# Altium PCB OSVentilatorV1.PcbDoc
Units mm, origin at the board's own origin, x right, y up, seen from the top; angles counter-clockwise.
Board outline 114.3 x 38.1 mm, 4 copper layers (Top Layer, Signal Layer 1, Signal Layer 2, Bottom Layer), stack 1.587 mm thick; 89 components, 68 nets, 351 pads, 167 vias.
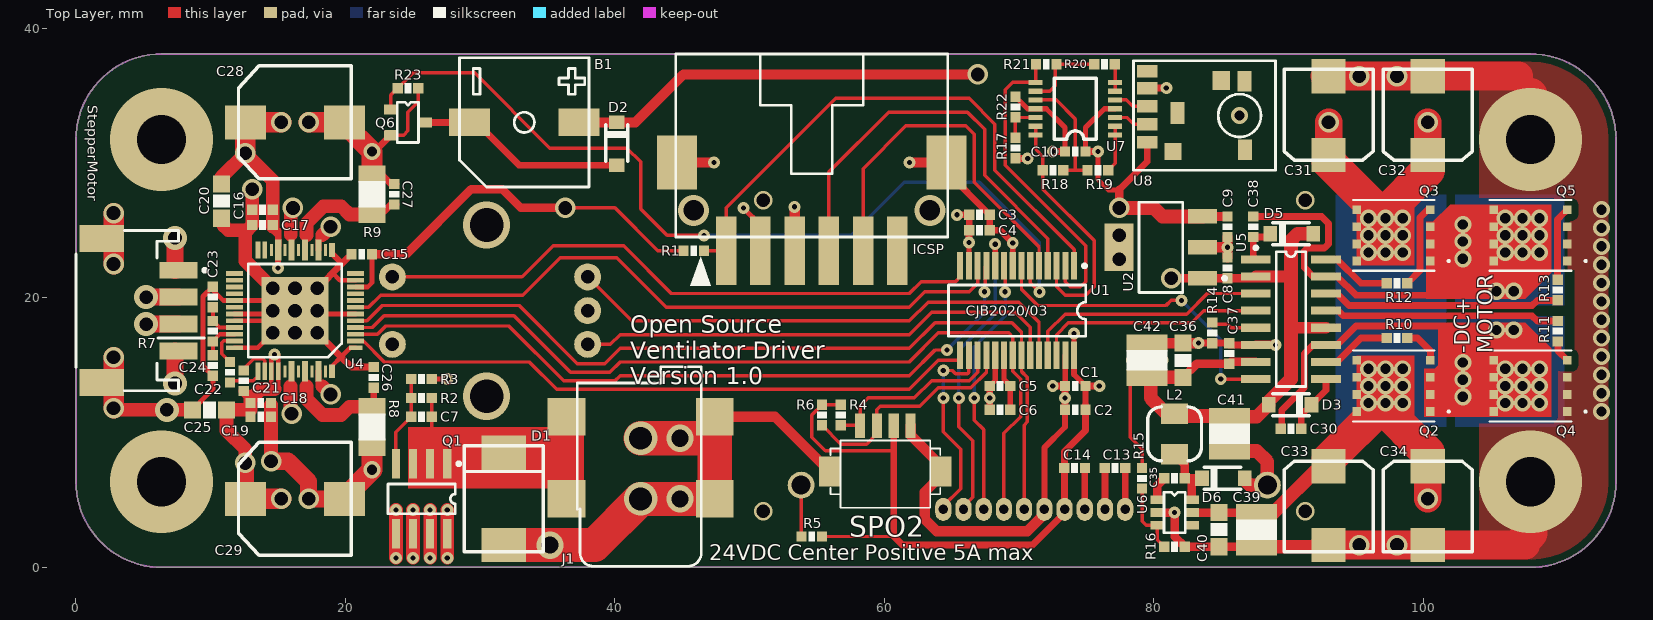
[diagram p0: Top Layer view]
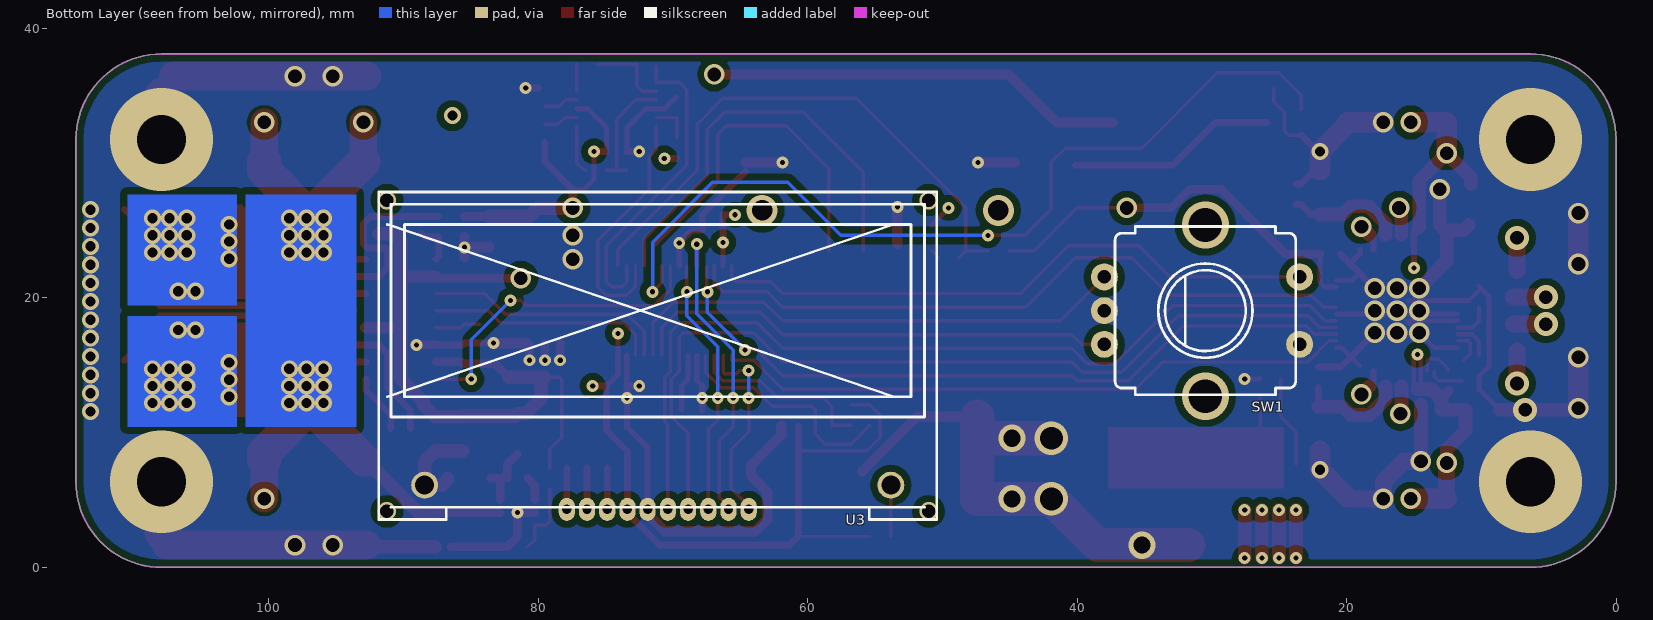
[diagram p1: Bottom Layer view, seen from below]
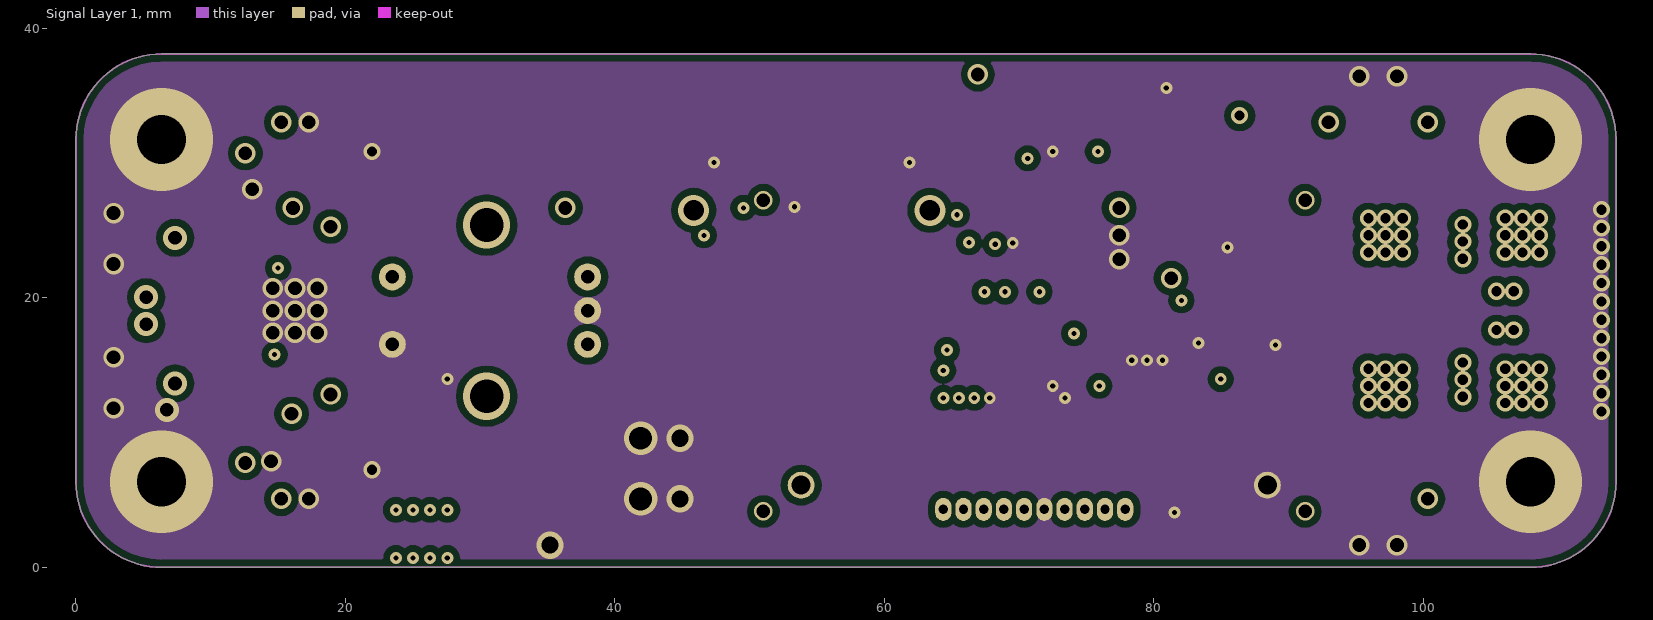
[diagram p2: Signal Layer 1]
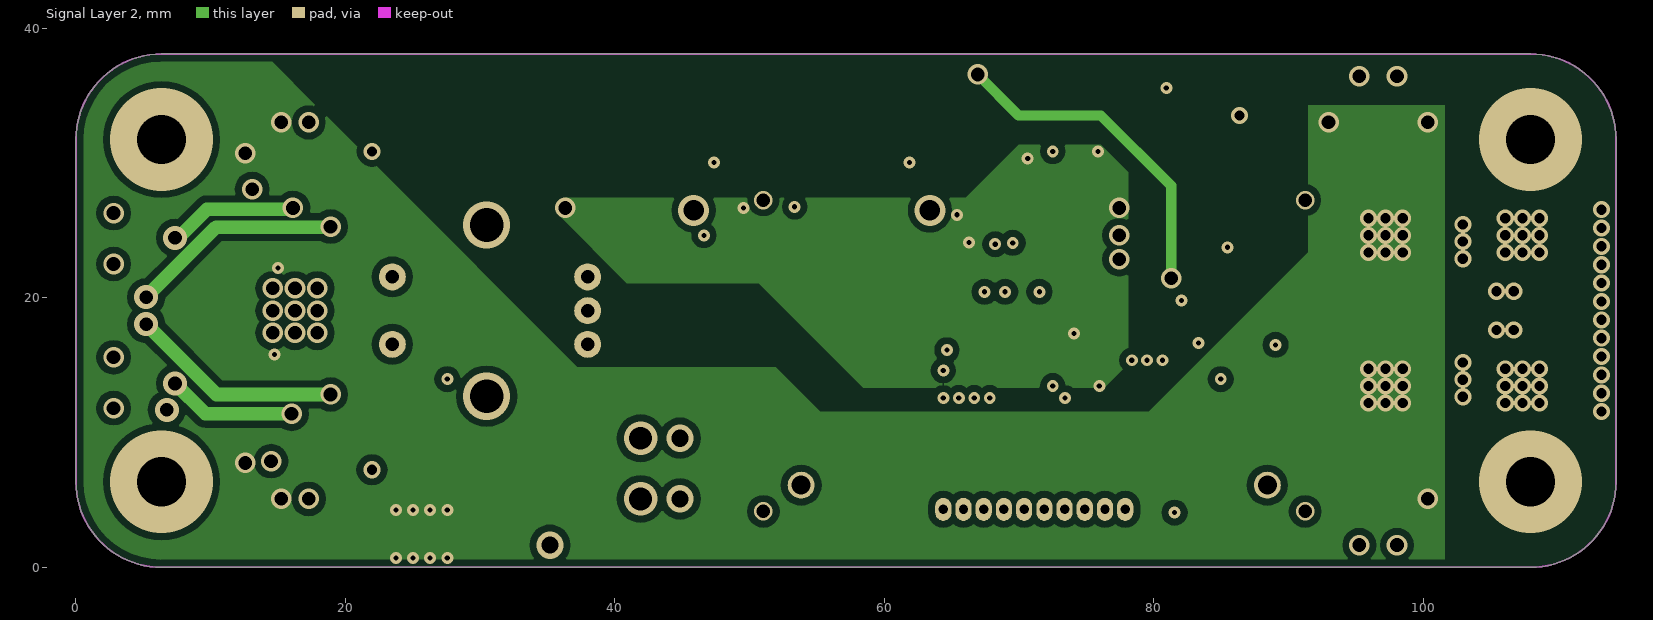
[diagram p3: Signal Layer 2]
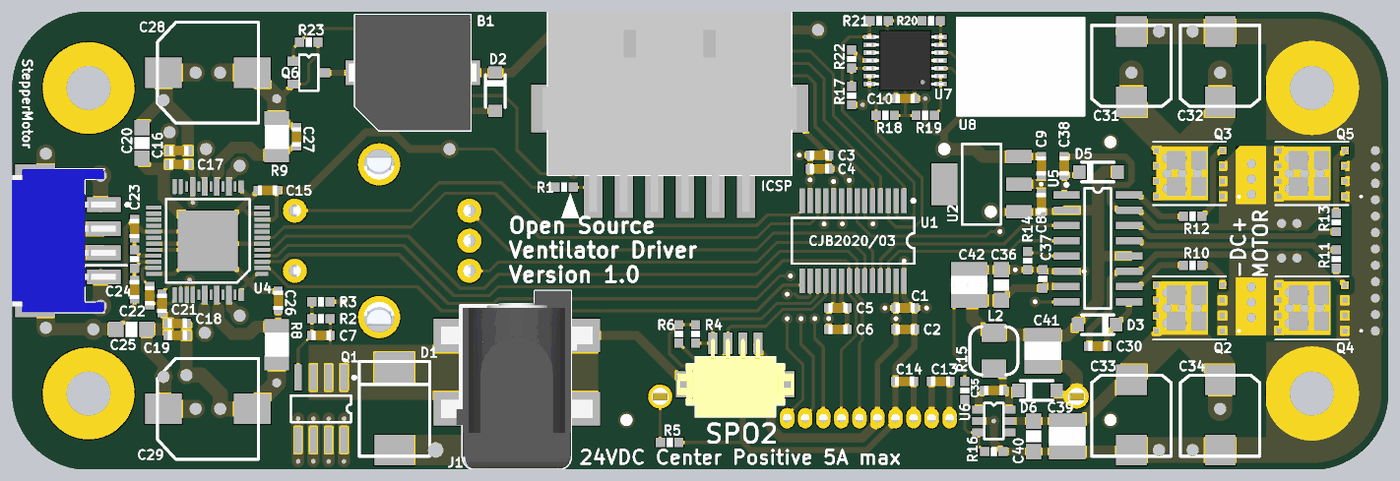
[diagram p4: 3D render of the assembled board from above, using the file's embedded part models]

## Layer stack, top to bottom
Top Solder: solder mask 0.0102, Solder Resist, Dk 3.5
Top Layer: signal copper 0.0356
Dielectric 1: core 0.254, FR-4, Dk 4.2
Signal Layer 1: signal copper 0.036
Dielectric 3: prepreg 0.9364, Dk 4.2
Signal Layer 2: signal copper 0.036
Dielectric 2: core 0.254, Dk 4.2
Bottom Layer: signal copper 0.0356
Bottom Solder: solder mask 0.0102, Solder Resist, Dk 3.5

## Board outline
6.35,0 cw(c6.35,6.35) 0,6.35 0,31.75 cw(c6.35,31.75) 6.35,38.1 107.95,38.1 cw(c107.95,31.75) 114.3,31.75 114.3,6.35 cw(c107.95,6.35) 107.95,0

## Design rules (kind name [scope] priority, off if disabled: settings)
Clearance Clearance_1 [InPoly] p1: gap=0.508 ignorepadtopadclearanceinfootprint=FALSE
Clearance [All] p2: gap=0.152 ignorepadtopadclearanceinfootprint=FALSE
ComponentClearance [All] p1 off: gap=0.254 collisioncheckmode=3 verticalgap=0.254 showdistances=FALSE
Height [All] p1 off: minheight=0 maxheight=25.4 prefheight=12.7
PolygonConnect [All] p1: connectstyle=Direct reliefconductorwidth=0.254 reliefentries=4 polygonreliefangle="90 Angle" airgapwidth=0.254
RoutingVias [All] p1: holewidth=0.381 width=0.889 viastyle="Through Hole" minholewidth=0.381 minwidth=0.889 maxholewidth=25.4 maxwidth=25.4
SolderMaskExpansion [All] p1: expansion=0.102 istentingtop=FALSE
Width [All] p1: maxlimit=25.4 minlimit=0.254 preferedwidth=0.254
28 further rules are at their usual default settings.

## Components (designator, comment, footprint, x,y, rotation, side; value= is the part's Value field where it differs from the comment)
B1 "668-1536-1-ND" "Buzzer 9.6mm Square" 33.274,33.02 r270 top
C1 "CAP_0805" "0603 Cap" 74.168,13.462 r180 top value=0.1uF
C2 "CAP_0805" "0603 Cap" 74.168,11.684 r180 top value=10nF
C3 "CAP_0805" "0603 Cap" 67.056,26.162 r0 top value=0.1uF
C4 "CAP_0805" "0603 Cap" 67.056,25.019 r0 top value=10nF
C5 "CAP_0805" "0603 Cap" 68.58,13.462 r180 top value=10uF
C6 "CAP_0805" 0603 68.58,11.684 r180 top value=1uF
C7 "CAP_0805" "0603 Cap" 25.654,11.176 r180 top value=4.7uF
C8 "CAP_0805" 0603 85.471,22.225 r90 top value=1uF
C9 "CAP_0805" 0603 85.471,25.273 r270 top value=1uF
C10 "CAP_0805" 0603 74.168,30.861 r180 top value=0.1uF
C13 "CAP_0805" "0603 Cap" 77.114,7.366 r180 top value=1uF
C14 "CAP_0805" "0603 Cap" 74.117,7.366 r180 top value=1uF
C15 "CAP_0805" "0603 Cap" 21.209,23.241 r180 top value=0.1uF
C16 "CAP_0805" "0603 Cap" 13.843,26.543 r180 top value=0.1uF
C17 "CAP_0805" "0603 Cap" 13.843,25.4 r180 top value=0.1uF
C18 "CAP_0805" "0603 Cap" 13.716,12.192 r0 top value=0.1uF
C19 "CAP_0805" "0603 Cap" 13.716,11.176 r0 top value=0.1uF
C20 "CAP_0805" "0805 Cap" 10.795,27.178 r270 top value="4.7uF 50v"
C21 "CAP_0805" "0603 Cap" 12.446,13.843 r90 top value=0.1uF
C22 "CAP_0805" "0603 Cap" 11.43,14.478 r270 top value="22nF 50v"
C23 "CAP_0805" "0603 Cap" 10.16,20.066 r90 top value=4.7uF
C24 "CAP_0805" "0603 Cap" 10.16,14.986 r270 top value=470nF
C25 "CAP_0805" "0805 Cap" 9.906,11.684 r180 top value="4.7uF 50v"
C26 "CAP_0805" "0603 Cap" 22.098,14.097 r90 top value=0.1uF
C27 "CAP_0805" "0603 Cap" 23.622,27.686 r90 top value=0.1uF
C28 "Capacitor Electrolytic" "Cap 8.3mm²" 16.256,33.02 r180 top locked value="330uF 25V"
C29 "Capacitor Electrolytic" "Cap 8.3mm²" 16.256,5.08 r180 top locked value="330uF 25V"
C30 "CAP_0805" "0603 Cap" 90.17,10.287 r0 top value="4.7uF 16v"
C31 "Capacitor Electrolytic" "Cap 6.6mm²" 92.964,33.528 r270 top locked value="220uF 35v"
C32 "Capacitor Electrolytic" "Cap 6.6mm²" 100.33,33.528 r270 top locked value="220uF 35v"
C33 "Capacitor Electrolytic" "Cap 6.6mm²" 92.964,4.572 r90 top locked value="220uF 35v"
C34 "Capacitor Electrolytic" "Cap 6.6mm²" 100.33,4.572 r90 top locked value="220uF 35v"
C35 "CAP_0805" "0603 Cap" 81.534,6.604 r0 top value=0.1uF
C36 "CAP_0805" 0805 82.169,15.367 r270 top value="10uF 16v"
C37 "CAP_0805" "0603 Res" 85.598,15.875 r270 top value="0.1uF 50V"
C38 "CAP_0805" "0603 Cap" 87.376,25.273 r270 top value="4.7uF 16v"
C39 "CAP_0805" "1210 Cap" 87.63,2.794 r270 top value="4.7uF 50v"
C40 "CAP_0805" "0805 Cap" 84.836,2.794 r270 top value=0.1uF
C41 "311-2054-1-ND" "1210 Cap" 85.598,9.906 r270 top value=47uF
C42 "311-2054-1-ND" "1210 Cap" 79.502,15.367 r90 top value=47uF
D1 "3.0SMCJ24ADICT-ND" DSO-C2/X3.3 31.75,5.08 r90 top
D2 "DB2W31800LCT-ND" SOD123 40.132,31.496 r0 top
D3 "DB2W31800LCT-ND" SOD123 90.17,12.065 r270 top
D5 "DB2W31800LCT-ND" SOD123 90.17,24.765 r90 top
D6 "DB2W31800LCT-ND" SOD123 85.09,6.604 r90 top
ICSP "TE MTE" "TE MTE 6POS SMT RA" 54.61,38.1 r0 top locked
J1 "2.5mm Power" "Power Jack 2.5x5.5 SMD RA" 41.91,5.08 r0 top locked
L2 "445-6553-1-ND" "Inductor - 4mm²" 81.534,9.906 r90 top value=6.8uH
Q1 "FDS4141" "SOIC 8" 25.654,5.08 r180 top
Q2 "CSD18563Q5A" VSONP-8 97.79,13.462 r180 top
Q3 "CSD18563Q5A" VSONP-8 97.79,24.638 r180 top
Q4 "CSD18563Q5A" VSONP-8 107.95,13.462 r180 top
Q5 "CSD18563Q5A" VSONP-8 107.95,24.638 r180 top
Q6 "MOSFET Nch SO-23-6" sot23-3 24.638,33.02 r270 top
R1 "RES_0805" "0603 Res" 45.847,23.495 r0 top value=10k
R2 "RES_0805" "0603 Res" 25.654,12.573 r180 top value=100k
R3 "RES_0805" "0603 Res" 25.654,13.97 r180 top value=100k
R4 "RES_0805" "0603 Res" 56.769,11.303 r270 top value=10k
R5 "RES_0805" "0603 Res" 54.61,2.286 r0 top value=10
R6 "RES_0805" "0603 Res" 55.372,11.303 r270 top value=10k
R7 "RES_0805" "0603 Res" 10.16,17.526 r270 top value=2.2
R8 "RES_0805" "1206 Res" 21.971,10.414 r90 top value=0.15
R9 "RES_0805" "1206 Res" 21.971,27.686 r270 top value=0.15
R10 "RES_0805" "0603 Res" 98.044,17.018 r0 top value=10
R11 "RES_0805" "0603 Res" 109.982,17.526 r270 top value=10
R12 "RES_0805" "0603 Res" 98.044,21.082 r0 top value=10
R13 "RES_0805" "0603 Res" 109.982,20.574 r90 top value=10
R14 "RES_0805" "0603 Res" 84.328,17.399 r90 top value=68k
R15 "RES_0805" "0603 Res" 79.121,6.604 r90 top value=10k
R16 "RES_0805" "0603 Res" 81.534,1.524 r180 top value=680
R17 "RES_0805" "0603 Res" 69.723,31.115 r270 top value=10k
R18 "RES_0805" "0603 Res" 72.517,29.464 r180 top value=100k
R19 "RES_0805" "0603 Res" 75.842,29.464 r0 top value=10k
R20 "RES_0805" "0603 Res" 76.327,37.338 r0 top value=10k
R21 "RES_0805" "0603 Res" 72.009,37.338 r0 top value=100k
R22 "RES_0805" "0603 Res" 69.723,34.163 r90 top value=10k
R23 "RES_0805" "0603 Res" 24.638,35.56 r180 top value=680
SPO2 "DF13 4POS" "DF13 4POS SMD RA" 60.071,7.112 r180 top locked
StepperMotor "JST S4B-PH SMRA" "JST S4B-PH SMRA" 3.81,19.05 r270 top locked
SW1 "Encoder PEC12R Vert" "Encoder PEC12R Vert" 30.48,19.05 r90 bottom
U1 "PIC24EP256MC202" SSOP-28 69.85,19.05 r180 top locked
U2 "Linear Reg." "SOT 223" 80.518,23.749 r90 top locked
U3 "NHD-C0216CZ-FSW-FBW-3V3" "LCD NHD-C0216CZ-FSW-FBW-3V3" 71.12,15.7 r180 bottom locked
U4 "TMC5130A-TA-T" "TQFP-48-EP 9mm TMC5130" 16.256,19.05 r270 top locked
U5 "HIP4082" "SOIC 16" 90.17,18.415 r270 top locked
U6 "LMR16006Y" SOT23-6 81.534,4.064 r270 top
U7 "MCP6424" TSSOP-14 74.168,34.036 r180 top
U8 "NPC-120" "Pressure Sensor NPC-120" 78.486,37.592 r270 top locked

## Footprints (in the part's own frame and the unit in brackets; to place one, negate y for a bottom-side part, rotate by r counter-clockwise, add the part's x,y. Pads: shape width x height; smd on the part's side, far side on the other; paste and mask are expansions set on the pad)
0603 [mil]
  rect 30x30 smd: 1(-30,0) 2(30,0)
  silkscreen extent -10,-15 10,15, body extent -31,-16 32,16, height 35
"0603 Cap" [mil]
  rect 30x30 smd: 1(-30,0) 2(30,0)
  silkscreen extent -10,-15 10,15, body extent -31,-16 32,16, height 35
"0603 Res" [mil]
  rect 30x30 smd: 1(-30,0) 2(30,0)
  silkscreen extent -10,-15 10,15, body extent -31,-17 31,17, height 18
0805 [mm]
  rect 1.27x1.27 smd: 1(-1.27,0) 2(1.27,0)
  silkscreen extent -0.48,-0.64 0.48,0.64
"0805 Cap" [mm]
  rect 1.27x1.27 smd: 1(-1.27,0) 2(1.27,0)
  silkscreen extent -0.48,-0.63 0.48,0.64, body extent -1,-0.62 1,0.63, height 1
"1206 Res" [mm]
  rect 1.27x2.032 smd: 1(-1.5,0) 2(1.5,0)
  silkscreen extent -1,-1 1,1, body extent -1.6,-0.8 1.6,0.8, height 0.55
"1210 Cap" [mil] "1210"
  rect 50x120 smd: 1(-50,0) 2(50,0)
  silkscreen extent -30,-60 30,60, body extent -63,-49 63,49, height 51
"Buzzer 9.6mm Square" [mil] "PUI SMI Series"
  rect 80x120 smd: 1(0,160) 2(0,-160)
  silkscreen extent -189,-189 189,189, body extent -189,-209 189,209, height 207
"Cap 6.6mm²" [mil]
  rect 100x100 smd: 1(115,0) 2(-115,0)
  silkscreen extent -135,-130 130,130
"Cap 8.3mm²" [mil]
  rect 120x100 smd: 1(145,0) 2(-145,0)
  silkscreen extent -165,-165 165,165
"DF13 4POS SMD RA" [mm]
  rect 1.6x2.2 smd: 0(-4.125,0) 0(4.125,0)
  rect 0.75x1.8 smd: 1(-1.875,-3.4) 2(-0.625,-3.4) 3(0.625,-3.4) 4(1.875,-3.4)
  silkscreen extent -4.08,-2.3 4.07,2.7, body extent -4.83,-3.8 4.83,2.7, height 3.63
DSO-C2/X3.3 [mil]
  rect 100x130 smd: 1(-135,0) 2(135,0)
  silkscreen extent -155,-115 155,115, body extent -156,-116 157,116, height 90
"Encoder PEC12R Vert" [mm] "PEC12R-4225F-S0024"
  round 2 hole 1: 1(2.5,-7) 2(-2.5,-7) 3(-2.5,7.5) 4(0,7.5) 5(2.5,7.5)
  silkscreen extent -6.25,-6.7 6.25,6.7, body extent -7,-7.15 7,7.6, height 25
"Inductor - 4mm²" [mil] "Power Inductor"
  rect 60x80 smd: 1(-59.06,0) 2(59.06,0)
  silkscreen extent -79,-79 79,79
"JST S4B-PH SMRA" [mm] "SMD, 4-Leads, Pitch 2mm"
  rect 2x3.302 smd: 0(-5.35,-1.905) 0(5.35,-1.905)
  rect 1.25x2.8 smd: 1(-3,3.8) 2(-1,3.8) 3(1,3.8) 4(3,3.8)
  silkscreen extent -5.95,-3.8 5.95,5.88, body extent -5.95,-3.8 5.95,4.8, height 5.6
"LCD NHD-C0216CZ-FSW-FBW-3V3" [mm] "NHD-C0216CZ-FSW-FBW-3V3"
  oval 1.2x1.7 hole 0.7: 1(6.75,-11.4) 2(5.25,-11.4) 3(3.75,-11.4) 4(2.25,-11.4) 5(0.75,-11.4) 6(-0.75,-11.4) 7(-2.25,-11.4) 8(-3.75,-11.4) 9(-5.25,-11.4) 10(-6.75,-11.4)
  round 2 hole 1.4: 11(-17.3,-9.6) 12(17.3,-9.6)
  silkscreen extent -20.7,-12.15 20.7,12.15, body extent -20.7,-12.15 20.7,12.15, height 4.1
"Power Jack 2.5x5.5 SMD RA" [mm] "CUI PJ-002BH-SMT-TR"
  rect 2.8x2.8 smd: 1(-5.5,0) 1(-5.5,6.1) 2(5.5,0) 3(5.5,6.1)
  silkscreen extent -4.7,-5 4.5,9.8, body extent -6.3,-5 6.3,9.8, height 11.2
"Pressure Sensor NPC-120" [mil] "Amphenol SMT pressure sensor"
  rect 36x60 smd: 0(31,40) 1(238,40) 2(185.33,40) 3(132.67,40) 4(80,40)
  rect 55x51 smd: 0(58,256)
  rect 59x41 smd: 0(60,325)
  rect 64x42 smd: 0(152.5,128.5)
  rect 60x40 smd: 0(260,326)
  rect 50x50 smd: 0(265,115)
  silkscreen extent 0,0 320,415, body extent 0,0 320,415, height 165
SOD123 [mil] "Diode"
  rect 45x40 smd: 1(0,-65) 2(0,60)
  silkscreen extent -32,-53 32,53, body extent -34,-76 33,76, height 56
"SOIC 8" [mm]
  rect 0.6x2.2 smd: 1(-1.905,-2.6) 2(-0.635,-2.6) 3(0.635,-2.6) 4(1.905,-2.6) 5(1.905,2.6) 6(0.635,2.6) 7(-0.635,2.6) 8(-1.905,2.6)
  silkscreen extent -2.88,-2.72 2.5,1.1, body extent -2.45,-3 2.45,3, height 1.75
"SOIC 16" [mm]
  rect 0.6x2.2 smd: 1(-4.445,-2.6) 2(-3.175,-2.6) 3(-1.905,-2.6) 4(-0.635,-2.6) 5(0.635,-2.6) 6(1.905,-2.6) 7(3.175,-2.6) 8(4.445,-2.6) 9(4.445,2.6) 10(3.175,2.6) 11(1.905,2.6) 12(0.635,2.6) 13(-0.635,2.6) 14(-1.905,2.6) 15(-3.175,2.6) 16(-4.445,2.6)
  silkscreen extent -5.42,-2.72 5,1.1
sot23-3 [mil]
  rect 30x40 smd: 1(-37.4,-50) 2(37.4,-50) 3(0,50)
  silkscreen extent -59,-31 59,31, body extent -57,-55 57,55, height 51
SOT23-6 [mm]
  rect 0.65x1.06 smd: 1(-0.95,-1.27) 2(0,-1.27) 3(0.95,-1.27) 4(0.95,1.27) 5(0,1.27) 6(-0.95,1.27)
  silkscreen extent -1.5,-0.79 1.5,0.79, body extent -1.45,-1.4 1.45,1.4, height 1.45
"SOT 223" [mm]
  rect 1.1x2.15 smd: 1(-2.3,-3.1) 2(0,-3.1) 3(2.3,-3.1)
  rect 3.5x2.15 smd: 4(0,3.1)
  silkscreen extent -3.35,-4.85 3.35,1.63
SSOP-28 [mm]
  rect 0.45x2.05 smd mask+0.051: 1(-4.225,-3.325) 2(-3.575,-3.325) 3(-2.925,-3.325) 4(-2.275,-3.325) 5(-1.625,-3.325) 6(-0.975,-3.325) 7(-0.325,-3.325) 8(0.325,-3.325) 9(0.975,-3.325) 10(1.625,-3.325) 11(2.275,-3.325) 12(2.925,-3.325) 13(3.575,-3.325) 14(4.225,-3.325) 15(4.225,3.325) 16(3.575,3.325) 17(2.925,3.325) 18(2.275,3.325) 19(1.625,3.325) 20(0.975,3.325) 21(0.325,3.325) 22(-0.325,3.325) 23(-0.975,3.325) 24(-1.625,3.325) 25(-2.275,3.325) 26(-2.925,3.325) 27(-3.575,3.325) 28(-4.225,3.325)
  silkscreen extent -5.12,-3.45 5.1,1.9
"TE MTE 6POS SMT RA" [mm] "5-147278-5"
  rect 3x4 smd: 0(-10,-8.053) 0(10,-8.053)
  rect 1.524x5.08 smd: 1(-6.35,-14.606) 2(-3.81,-14.606) 3(-1.27,-14.606) 4(1.27,-14.606) 5(3.81,-14.606) 6(6.35,-14.606)
  silkscreen extent -10.1,-13.59 10.1,0, body extent -10.57,-16.64 10.57,0, height 7.11
"TQFP-48-EP 9mm TMC5130" [mm]
  rect 5x5 smd: 0(0,0)
  rect 0.345x1.016 smd mask+0.051: 1(2.75,4.5)
  rect 0.345x1.27 smd mask+0.051: 2(2.25,4.5) 3(1.75,4.5) 4(1.25,4.5) 5(0.75,4.5) 6(0.25,4.5) 7(-0.25,4.5) 8(-0.75,4.5) 9(-1.25,4.5) 10(-1.75,4.5) 11(-2.25,4.5) 12(-2.75,4.5) 25(-2.75,-4.5) 26(-2.25,-4.5) 27(-1.75,-4.5) 28(-1.25,-4.5) 29(-0.75,-4.5) 30(-0.25,-4.5) 31(0.25,-4.5) 32(0.75,-4.5) 33(1.25,-4.5) 34(1.75,-4.5) 35(2.25,-4.5) 36(2.75,-4.5)
  rect 1.016x0.465 smd mask+0.051: 13(-4.5,2.75) 48(4.5,2.75)
  rect 0.889x0.229 smd mask+0.051: 14(-4.5,2.25) 16(-4.5,1.25) 18(-4.5,0.25) 20(-4.5,-0.75) 22(-4.5,-1.75) 41(4.5,-0.75) 43(4.5,0.25) 45(4.5,1.25) 47(4.5,2.25)
  rect 1.524x0.465 smd mask+0.051: 15(-4.5,1.75) 17(-4.5,0.75) 19(-4.5,-0.25) 21(-4.5,-1.25) 42(4.5,-0.25) 44(4.5,0.75) 46(4.5,1.75)
  rect 1.27x0.345 smd mask+0.051: 23(-4.5,-2.25) 24(-4.5,-2.75) 37(4.5,-2.75) 38(4.5,-2.25) 39(4.5,-1.75) 40(4.5,-1.25)
  silkscreen extent -3.47,-3.47 3.47,3.47, body extent -4.5,-4.5 4.5,4.5, height 1.46
TSSOP-14 [mil]
  rect 40x15 smd: 1(-116.14,76.77) 2(-116.14,51.18) 3(-116.14,25.59) 4(-116.14,0) 5(-116.14,-25.59) 6(-116.14,-51.18) 7(-116.14,-76.77) 8(116.14,-76.77) 9(116.14,-51.18) 10(116.14,-25.59) 11(116.14,0) 12(116.14,25.59) 13(116.14,51.18) 14(116.14,76.77)
  silkscreen extent -61,-90 61,90, body extent -126,-100 126,100, height 47
VSONP-8 [mm]
  rect 0.63x0.65 smd paste-0.1: 1(-2.735,1.905) 2(-2.735,0.635) 3(-2.735,-0.635) 4(-2.735,-1.905) 5(2.735,-1.905) 6(2.735,-0.635) 7(2.735,0.635) 8(2.735,1.905)
  Top Layer region: 2.745,0 2.745,2.23 -1.545,2.23 -1.545,0
  Top Layer region: 2.745,0 2.745,-2.23 -1.545,-2.23 -1.545,0
  silkscreen extent -4.17,-2.63 3.03,2.63

## Part data
B1: library part Buzzer, ManufacturerPartNumber=SMI-1027-TW-12V-R
C1 C2 C3 C4 C5 C6 C10 C30 C36 C37 C38: "0805 SMT Cap"
C7 C23: "0805 SMT Cap", ManufacturerPartNumber=GRM188R6YA475KE15D
C8 C9: "0805 SMT Cap", ManufacturerPartNumber=CC0603KRX7R9BB105
C13 C14 C40: "0805 SMT Cap", ManufacturerPartNumber=CC0805KKX7R9BB105
C15 C16 C17 C18 C19 C21 C26 C27 C35: "0805 SMT Cap", ManufacturerPartNumber=CC0603KRX7R9BB104
C20 C25: "0805 SMT Cap", ManufacturerPartNumber=GRM21BR61H475KE51L
C22: "0805 SMT Cap", ManufacturerPartNumber=CGA3E2X7R2A223K080AA
C24: "0805 SMT Cap", ManufacturerPartNumber=CL10A474KB8NNNC
C28 C29: "493-6384-1-ND", ManufacturerPartNumber=EEE-FK1E331P
C31 C32 C33 C34: "493-6384-1-ND", Manufacturer="Generic Components", Class I=Passive, Class II=Capacitor, Published=8-Jun-2000, Publisher="Altium Limited", Revision="July-2002: Re-released for DXP Platform."
C39: "0805 SMT Cap", ManufacturerPartNumber=CL32B475KBJVPNE
C41 C42: library part CAP_0805, "0805 SMT Cap", ManufacturerPartNumber=CL32A476KOJNNNE
D1: library part "Diode Schottky (SMC)", "TVS Diode", ManufacturerPartNumber=SMLJ24CA-Q
D2 D3 D5 D6: library part "D Schottky", ManufacturerPartNumber=DB2W31800L
ICSP: library part "DF13 6POS", ManufacturerPartNumber=5-147278-5
J1: "2.5mm Power Jack with Switch", Manufacturer="Generic Components", Class I=Connector, Publisher="Altium Limited", Revision="July-2002: Re-released for DXP Platform."
L2: library part Inductor, "Inductor Large 22uH", ManufacturerPartNumber=VLCF4028T-6R8N1R3-2
Q1: library part "MOSFET P Ch SOIC", ManufacturerPartNumber=FDS4141
Q2 Q3 Q4 Q5: library part "MOSFET N-ch 8-pin", "No Description Available", Manufacturer_Part_Number=CSD18563Q5A
Q6: "IRLML6346TRPBFCT-ND", ManufacturerPartNumber=IRLML0030TRPBF
R1 R4 R6 R10 R11 R12 R13 R14: "0805 SMT Resistor"
R2 R3: "0805 SMT Resistor", ManufacturerPartNumber=RC0603FR-07100KL
R5: "0805 SMT Resistor", ManufacturerPartNumber=RC0603FR-0710R0L
R7: "0805 SMT Resistor", ManufacturerPartNumber=RC0603FR-072R2L
R8 R9: "0805 SMT Resistor", ManufacturerPartNumber=RL1206FR-7W0R15L
R15: "0805 SMT Resistor", ManufacturerPartNumber=RC0603FR-0754K9L
R16 R23: "0805 SMT Resistor", ManufacturerPartNumber=RC0603FR-0710KL
R17 R18 R19 R20 R21 R22: "0805 SMT Resistor", ManufacturerPartNumber=RC0603FR-0749R9L
StepperMotor: library part "DF13 4POS", ManufacturerPartNumber=S4B-PH-SM4-TB(LF)(SN)
SW1: library part "Encoder w/Switch", ManufacturerPartNumber=PEC12R-4225F-S0024
U1: library part PIC24EPxxxMC202
U2: library part "Linear Regulator", "LM2937", ManufacturerPartNumber=LM2937IMP-3.3/NOPB
U3: library part "LCD NHD-C0216CZ-FSW-FBW-3V3", ManfuacturerPartNumber=NHD-C0216CZ-FSW-FBW-3V3
U4: library part "Stepper Driver TMC5130", ManufacturerPartNumber=TMC5130A-TA-T
U5: library part "H-Bridge Driver", "Intersil HIP4082"
U6: library part "Sw Reg Buck LMR16006Y", "IC REG BUCK ADJ 0.6A 6SOT", ManufacturerPartNumber=LMR16006YDDCR
U7: library part "Op-Amp Quad", "Quad Op-Amp"
U8: library part "Pressure Sensor NPC-120", "Amphenol SMT Medical Pressure Sensor"

## Via types
v1: diameter 1.27, hole 0.762, Top Layer to Bottom Layer, tented both sides, 60 vias
v2: diameter 0.889, hole 0.381, Top Layer to Bottom Layer, tented both sides, 46 vias
v3: diameter 1.524, hole 1.016, Top Layer to Bottom Layer, tented both sides, 29 vias
v4: diameter 1.524, hole 1.016, Top Layer to Bottom Layer, 9 vias
v5: diameter 1.778, hole 1.016, Top Layer to Bottom Layer, tented both sides, 5 vias
v6: diameter 1.372, hole 1, Top Layer to Bottom Layer, tented both sides, 4 vias
v7: diameter 7.62, hole 3.658, Top Layer to Bottom Layer, 4 vias
v8: diameter 2.032, hole 1.27, Top Layer to Bottom Layer, tented both sides, 3 vias
v9: diameter 3.5, hole 2.5, Top Layer to Bottom Layer, 2 vias
v10: diameter 2.5, hole 1.7, Top Layer to Bottom Layer, 2 vias
v11: diameter 2.286, hole 1.524, Top Layer to Bottom Layer, tented both sides, 2 vias
v12: diameter 1.27, hole 0.762, Top Layer to Bottom Layer, 1 vias

## Nets (pads, with @x,y where several pads share a name; then routed paths per layer and width w, separated by ;. In a path a pad name is that pad's centre, name@x,y a point inside that pad or via, vN(x,y) a via of type N, cw(c..) or ccw(c..) an arc to the next point about the centre after c; other vN are vias at no path point)
+3.3v: C1.1 C2.1 C3.1 C4.1 C9.1 C10.1 C14.2 C15.1 ICSP.2 R1.1 R4.1 R5.2 R6.1 R17.2 SPO2.2 U1.13 U1.28 U2.3 U3.7 U4.10 U7.4 U8.1 | length 115.6
  Top Layer w0.254: v3(36.322,26.67) 40.005,26.67 43.18,23.495 R1.1 ; ICSP.2@50.292,22.986 ICSP.2 ; R5.2 60.686,2.286 ; R4.1 R6.1 54.61,11.303 54.61,9.652 55.626,8.636 60.696,8.636 ; U3.7@73.37,4.028 U3.7
  Top Layer w0.345: U4.10 21.638,20.8 21.971,21.133 C15.1
  Top Layer w0.381: v2(49.53,26.67) ICSP.2@50.8,25.4 ; U1.13 v2(66.275,24.111) ; U1.28 v2(74.075,17.365) ; C10.1 74.93,32.639 76.327,34.036 U7.4 ; v2(75.842,30.861) 75.842,28.806 76.633,28.015 77.418,28.015
  Top Layer w0.432: U1.28 74.075,14.317 C1.1 ; 74.93,12.065 C1.1 ; C1.1@74.93,13.589 C1.1
  Top Layer w0.508: SPO2.2 60.696,8.636 60.696,2.296 61.341,1.651 70.993,1.651 U3.7@73.37,4.028 ; v2(65.382,26.162) C3.1 C4.1 ; v2(66.275,24.111) C4.1@66.275,25 ; R17.2 v2(70.635,30.353) ; U3.7 73.37,8.6 74.93,10.16 C2.1 74.93,12.065 ; C1.1 v2(75.946,13.462) ; C10.1 v2(75.842,30.861) ; 77.418,28.015 79.502,30.099 U8.1
  Top Layer w0.635: C15.1 24.511,23.241 29.337,28.067 31.623,28.067 33.02,26.67 v3(36.322,26.67) ; v3(77.418,26.67) 77.418,28.015 ; U2.3@83.632,26.035 C9.1
  Top Layer w1.016: v3(77.418,26.67) 80.01,26.67 80.645,26.035 U2.3@83.632,26.035
+5Vo1: C23.1 R7.1 U4.33 | length 2.8
  Top Layer w0.305: C23.1 R7.1 10.648,17.8 U4.33
+12v: B1.1 C8.1 C36.2 C37.2 C41.1 C42.1 D2.2 D3.1 D5.1 L2.2 R15.2 U2.1 U5.2 U5.7 U5.12 | length 109.9
  Top Layer w0.254: R15.2 79.121,8.763 78.232,9.652 78.232,13.97 78.359,14.097 C42.1
  Top Layer w0.508: C8.1@85.457,21.449 C8.1 ; C37.2 C37.2@85.725,15.24
  Top Layer w0.635: v3@81.294,21.449 U2.1 C8.1@85.457,21.449 ; C36.2 83.185,15.113 C37.2 ; C8.1 U5.2@87.57,21.463 ; C37.2@85.725,15.24 U5.7
  Top Layer w0.762: B1.1 D2.2 41.529,33.02 45.085,36.576 v3(66.929,36.576)
  Top Layer w0.889: L2.2 L2.2@81.713,11.227 ; U5.2 90.17,21.59 ; 90.297,17.78 U5.12
  Top Layer w1.016: C42.1 C42.1@79.756,14.097 ; L2.2 80.923,11.406 79.756,12.573 C42.1@79.756,14.097 ; L2.2@81.713,11.227 85.547,11.227 C41.1 87.63,11.176 D3.1 88.519,12.319 90.17,13.97 90.17,21.59 90.17,24.257 90.678,24.765 D5.1 ; C36.2 C42.1@79.756,14.097
  Signal Layer 2 w0.762: v3(66.929,36.576) 69.977,33.528 76.073,33.528 81.28,28.321 v3(81.28,21.463)
+24v: C16.1 C17.1 C18.1 C19.1 C20.1 C21.1 C25.1 C28.1 C29.1 C31.1 C32.1 C33.1 C34.1 C39.1 C40.1 Q1.5 Q1.6 Q1.7 Q1.8 Q2.5 Q2.6 Q2.7 Q2.8 Q3.5 Q3.6 Q3.7 Q3.8 U4.21 U4.39 U4.40 U6.5 | length 94.2
  Top Layer w0.345: 14.506,13.335 U4.39 v2@14.506,15.765 ; 15.006,13.335 U4.40 v2@15.006,15.765
  Top Layer w0.457: v2(15.006,22.225) U4.21
  Top Layer w0.465: C17.1@14.605,25.019 15.006,24.618 ; U4.21@15.006,23.876 15.006,24.618 ; 15.006,24.999 15.006,24.618
  Top Layer w0.635: U6.5 C40.1 C39.1
  Top Layer w0.762: C21.1 12.954,12.573
  Top Layer w1.016: C20.1 10.795,28.956 v3(12.573,30.734) 14.605,28.702 C16.1 C17.1 C17.1@14.605,25.273 ; C25.1@11.176,11.43 11.176,10.16 12.573,8.763 v3(12.573,7.747) ; C25.1 12.954,11.684 C18.1 12.954,12.446 13.741,13.233 14.732,13.233 ; v2@23.749,0.724 Q1.5 v2(23.749,4.258) ; v2@25.019,0.724 Q1.6 v2(25.019,4.258) ; v2@26.289,0.724 Q1.7 v2(26.289,4.258) ; v2@27.559,0.724 Q1.8 v2(27.559,4.258) ; C39.1 88.9,4.064 C33.1@92.329,7.493
  Top Layer w1.27: C29.1 v3(12.573,7.747)
  Top Layer w1.524: C29.1 v3(15.24,5.08) ; v3(12.573,30.734) C28.1 v3(15.24,33.02) ; C33.1@92.71,7.493 C33.1@92.71,8.001 ; C31.1@92.71,30.099 C31.1@92.71,30.607 ; C34.1 C34.1@100.33,8.001 ; C32.1@100.33,30.099 C32.1
  Top Layer w2.032: C31.1 v3(92.964,33.02) ; v3(100.33,5.08) C34.1 ; C32.1 v3(100.33,33.02)
  Top Layer w2.54: C33.1@92.964,8.001 v1@96.901,11.938 ; C31.1@92.964,30.099 96.664,26.399 ; 96.41,26.399 v1@97.19,25.619 ; v1@96.774,12.065 v1@96.901,11.938 ; v1@97.028,12.065 v1@96.901,11.938 ; v1@97.19,26.324 100.33,29.464 C32.1@100.33,30.099 ; C34.1@100.33,8.001 100.33,8.509 v1@96.901,11.938
  other v1: 95.92,12.192 97.19,12.192 98.46,12.192 95.92,13.462 97.19,13.462 98.46,13.462 95.92,14.732 97.19,14.732 98.46,14.732 95.92,23.368 97.19,23.368 98.46,23.368 95.92,24.638 97.19,24.638 98.46,24.638 95.92,25.908 97.19,25.908 98.46,25.908
  other v2: 23.749,0.702 25.019,0.702 26.289,0.702 27.559,0.702 14.747,15.791
+Vin: C7.1 D1.2 J1.1 Q1.1 Q1.2 Q1.3 R2.1 | length 2.7
  Top Layer w0.254: 26.416,9.906 C7.1 R2.1
AHBL: C30.2 D3.2 U5.9 | length 4.4
  Top Layer w0.508: C30.2 90.932,11.303 D3.2 92.77,13.141 U5.9
AHO: Q2.4 R10.2 | length 2.8
  Top Layer w0.508: R10.2 99.568,17.018 100.525,16.061 Q2.4
Alarm: Q6.1 R23.2 U1.6 | length 66.3
  Top Layer w0.254: Q6.1 23.368,35.052 R23.2 25.019,36.703 29.591,36.703 35.179,31.115 40.894,31.115 41.91,30.099 41.91,26.592 43.864,24.638 v2(46.609,24.638) ; U1.6 70.825,21.123 v2(71.501,20.447)
  Bottom Layer w0.254: v2(46.609,24.638) 57.531,24.638 61.468,28.575 67.056,28.575 71.501,24.13 v2(71.501,20.447)
ALO: Q4.4 R11.2 | length 1.7
  Top Layer w0.508: R11.2 109.982,16.07 Q4.4
BHO: Q3.4 R12.2 | length 6.3
  Top Layer w0.508: R12.2 99.742,22.018 99.742,25.955 100.33,26.543 Q3.4
BLO: Q5.4 R13.2 | length 5.5
  Top Layer w0.508: R13.2@109.957,21.336 109.957,25.822 110.449,26.314 110.456,26.314 Q5.4
BRA1: C26.1 R8.2 U4.44 | length 8.1
  Top Layer w0.508: R8.2@22.098,11.914 C26.1
  Top Layer w1.016: 17.108,13.437 17.108,12.483 18.288,11.303 19.685,11.303 20.296,11.914 R8.2@22.098,11.914
BRB1: C27.1 R9.2 U4.17 | length 8.6
  Top Layer w0.508: R9.2 22.63,26.186 23.368,26.924 C27.1 C27.1@23.749,26.924
  Top Layer w1.016: 17.108,24.663 17.108,25.54 18.364,26.797 19.685,26.797 20.296,26.186 R9.2
BridgeDisable: U1.7 U5.8 | length 23.9
  Top Layer w0.254: U1.7 70.175,20.63 71.374,19.431 80.899,19.431 81.28,19.812 v2(82.042,19.812) ; v2(84.963,13.97) U5.8
  Bottom Layer w0.254: v2(82.042,19.812) 84.963,16.891 v2(84.963,13.97)
Button: SW1.1 U1.14 | length 45.9
  Top Layer w0.254: SW1.1 33.107,21.55 35.433,23.876 40.64,23.876 44.196,20.32 61.849,20.32 62.738,21.209 65.278,21.209 65.625,21.556 U1.14
CLK_16MHz: U1.15 U4.2 | length 47.6
  Top Layer w0.254: U4.2 21.332,16.8 22.892,15.24 33.655,15.24 35.687,13.208 61.849,13.208 64.008,15.367 65.625,15.367 U1.15
CPI1: C22.2 U4.37 | length 2.6
  Top Layer w0.254: C22.2@11.43,13.843 13.173,13.843 13.506,14.176 U4.37
CPO1: C22.1 U4.35 | length 2.5
  Top Layer w0.254: C22.1@11.303,15.367 10.82,15.85 10.82,16.662 10.958,16.8 U4.35
CSN_Display: U1.9 U3.3 | length 19.2
  Top Layer w0.254: v2(66.669,12.573) 66.669,10.928 67.37,10.227 U3.3 ; v2@68.961,20.574 U1.9@68.961,22.364
  Bottom Layer w0.254: v2(66.669,12.573) 66.669,16.377 68.961,18.669 v2(68.961,20.447)
CSN_Motor: U1.11 U4.3 | length 54.1
  Top Layer w0.254: U4.3 22.38,17.3 22.987,17.907 32.131,17.907 36.195,13.843 40.005,13.843 40.386,14.224 61.849,14.224 63.754,16.129 v2(64.643,16.129) ; v2(67.437,20.447) 67.493,20.503 U1.11@67.493,22.293
  Bottom Layer w0.254: v2(64.643,16.129) 67.437,18.923 v2(67.437,20.447)
Delay: R14.2 U5.5 | length 3.3
  Top Layer w0.254: R14.2@84.328,18.034 85.471,18.034 85.725,17.78 U5.5
Display_!Reset: U1.16 U3.1 | length 14.8
  Top Layer w0.254: U3.1 64.37,4.553 65.659,5.842 65.659,8.763 64.37,10.052 v2@64.37,12.554 ; v2(64.37,14.605) 65.024,14.605 65.278,14.351 66.167,14.351 66.275,14.459 U1.16 ; v2@64.389,14.859 64.389,14.84 v2@64.497,14.732
  Bottom Layer w0.254: v2(64.37,12.573) v2(64.37,14.605)
Display_RS: U1.10 U3.2 | length 23.1
  Top Layer w0.254: v2(65.519,12.573) 65.519,10.427 66.548,9.398 66.548,5.207 65.87,4.529 U3.2
  Top Layer w0.381: U1.10 v2(68.225,23.978)
  Bottom Layer w0.254: v2(65.519,12.573) 65.519,16.116 68.225,18.822 v2(68.225,23.978)
GND: C1.2 C2.2 C3.2 C4.2 C5.2 C6.2 C8.2 C9.2 C10.2 C15.2 C16.2 C17.2 C18.2 C19.2 C20.2 C23.2 C24.2 C25.2 C26.2 C27.2 C28.2 C29.2 C31.2 C32.2 C33.2 C34.2 C36.1 C37.1 C39.2 C40.2 C41.2 C42.2 D1.1 D6.1 ICSP.0 ICSP.3 J1.2 J1.3 Q4.1 Q4.2 Q4.3 Q5.1 Q5.2 Q5.3 Q6.2 R3.1 R8.1 R9.1 R14.1 R16.1 R22.2 R23.1 SPO2.0 SPO2.1 StepperMotor.0 SW1.2 SW1.4 U1.8 U1.19 U1.27 U2.2 U2.4 U3.6 U3.11 U4.0 U4.1 U4.6 U4.11 U4.13 U4.29 U4.31 U4.32 U4.36 U4.48 U5.6 U6.2 U7.11 U8.4 | length 272
  Top Layer w0.254: Q6.2 24.323,32.07 24.638,32.385 24.638,33.782 25.4,34.544 R23.1
  Top Layer w0.33: U4.48@19.006,14.942 19.685,15.621 20.364,16.3 U4.1
  Top Layer w0.345: C23.2@10.16,20.574 10.934,19.8 U4.29 U4.0@15.434,19.8 ; U4.36 13.506,16.3 v4(14.605,17.399) 15.506,18.3 U4.32 ; U4.31 U4.0@15.506,18.8 ; U4.0@17.006,18.8 U4.6 ; 19.006,21.888 19.05,21.844 19.594,21.3 U4.11
  Top Layer w0.381: C25.2 10.16,13.208 C24.2 9.436,14.948 9.436,20.104 C23.2 ; R3.1 v2(27.559,13.97) ; C5.2 68.225,13.869 U1.19 ; U1.8 v2(69.525,24.074) ; R22.2 70.612,34.036 U7.11 72.009,34.036 73.406,32.639 C10.2 ; C1.2 C1.2@73.425,13.462
  Top Layer w0.432: U3.6 71.87,8.878 73.406,10.414 C2.2 73.406,12.065 ; C1.2@73.425,13.462 U1.27
  Top Layer w0.457: U4.13 19.006,23.285 19.748,22.543
  Top Layer w0.508: U4.0@18.542,16.764 19.685,15.621 20.447,14.859 C26.2 ; U4.0@18.542,21.336 19.05,21.844 19.748,22.543 C15.2 ; v1@22.286,30.988 Q6.2 ; R9.1@22.63,29.186 23.368,28.448 C27.2 C27.2@23.749,28.448 ; ICSP.0@64.61,29.37 C3.2 C4.2 68.58,25.019 v2(69.525,24.074) ; C6.2 C5.2 ; v2(72.494,13.462) C1.2 v2(73.406,12.573) 73.406,12.065 ; v2(72.494,30.861) C10.2 ; U8.4@80.01,35.56 v2(80.922,35.56) ; v2@83.566,16.637 R14.1 85.471,16.637 C37.1@85.598,16.51 ; C37.1@85.725,16.51 U5.6
  Top Layer w0.635: v2(78.359,15.367) C42.2@78.359,16.637 ; v2(79.502,15.367) C42.2 ; U6.2 v2(81.534,4.064) 81.534,2.286 R16.1 C40.2 C39.2@86.487,1.524 ; v2(80.645,15.367) C42.2@80.645,16.637 ; U5.6 v2(89.027,16.51)
  Top Layer w0.762: ICSP.0@44.61,30.047 v2(47.362,30.047) ; J1.3 51.878,11.18 SPO2.0@55.946,7.112 ; ICSP.3@53.34,24.003 v2(53.34,26.755) ; v2(61.858,30.047) ICSP.0@64.61,30.047 ; SPO2.1 61.946,9.809 64.196,7.559 64.196,7.112 64.196,6.792 62.992,5.588 62.992,3.556 63.881,2.667 70.612,2.667 U3.6@71.87,3.925 ; C42.2@80.772,16.637 C36.1 v2(83.312,16.637) ; U2.2 v2(85.471,23.749) ; C8.2 C9.2
  Top Layer w1.016: v3@2.794,11.684 v5(6.747,11.684) C25.2 ; C20.2@10.922,25.4 11.303,25.019 12.573,25.019 12.573,24.892 ; v3(13.081,28.067) C16.2 C17.2 12.573,24.892 ; U4.0@14.16,21.145 12.573,22.733 12.573,24.892 ; v3(14.478,7.874) C19.2 C18.2@14.478,12.065 ; C41.2 87.63,8.636 88.42,7.846 U3.11 87.118,6.1 86.741,6.477 D6.1 ; C39.2 C33.2@92.837,1.524
  Top Layer w1.27: v3(14.478,7.874) 15.748,7.874 17.272,6.35 v3(17.272,5.08) C29.2
  Top Layer w1.524: v3(2.794,11.811) v3(2.794,15.589) ; v3(2.794,22.511) v3(2.794,26.289) ; v3(17.272,33.02) C28.2 19.939,32.893 v1(21.971,30.861) R9.1@21.971,29.464 ; C29.2@19.939,5.207 v1(21.971,7.239) R8.1@21.971,8.636
  Top Layer w2.159: C33.2@92.71,1.651 C33.2 v3(95.25,1.651) v3(98.044,1.651) C34.2 107.569,1.651 ; C31.2@92.71,36.449 C31.2 v3(95.25,36.449) v3(98.044,36.449) C32.2 107.061,36.449
  Top Layer w2.54: D1.1 v8(35.179,1.651) 38.481,1.651 v10(41.91,5.08) v8(44.831,5.08) J1.2 J1.3 ; v10(41.91,9.58) v8(44.831,9.58) 47.355,9.58 ; 107.569,2.159 107.95,2.54 v7(107.95,6.35) ; v7(107.95,31.75) v7@107.95,35.052
  other v1: 113.225,11.557 113.225,12.919 113.225,14.282 113.225,15.644 113.225,17.006 113.225,18.369 113.225,19.731 113.225,21.094 113.225,22.456 113.225,23.818 113.225,25.181 113.225,26.543
  other v2: 67.818,12.573
  other v3: 77.418,22.86 77.418,24.638
  other v4: 16.256,17.399 17.907,17.399 14.605,19.05 16.256,19.05 17.907,19.05 14.605,20.701 16.256,20.701 17.907,20.701
  other v7: 6.35,6.35 6.35,31.75
LBHB: C38.2 D5.2 U5.1 | length 3.1
  Top Layer w0.508: U5.1 87.376,23.054 C38.2 88.392,24.511 D5.2
M1A1: StepperMotor.3 U4.46 | length 20.2
  Top Layer w0.465: 18.006,13.462 U4.46
  Top Layer w1.016: 18.276,13.449 v3(18.898,12.827)
  Top Layer w1.27: v5(5.207,18.05) StepperMotor.3
  Signal Layer 2 w1.016: v5(5.207,18.05) 10.43,12.827 v3(18.898,12.827)
M1A2: StepperMotor.4 U4.42 | length 13.8
  Top Layer w1.016: v3@15.926,11.586 15.926,13.437
  Top Layer w1.27: v5(7.356,13.647) StepperMotor.4@7.356,16.05
  Signal Layer 2 w1.016: v5(7.356,13.647) 9.607,11.396 v3(16.002,11.396)
M1B1: StepperMotor.2 U4.15 | length 20.2
  Top Layer w0.465: U4.15 18.006,24.658
  Top Layer w1.016: 18.288,24.663 v3@18.91,25.285
  Top Layer w1.27: v5(5.207,20.05) StepperMotor.2
  Signal Layer 2 w1.016: v5(5.207,20.05) 10.405,25.248 18.86,25.248 v3(18.898,25.285)
M1B2: StepperMotor.1 U4.19 | length 13.6
  Top Layer w1.016: 15.939,24.68 v3@15.939,26.531
  Top Layer w1.27: StepperMotor.1@7.356,22.05 v5(7.356,24.453)
  Signal Layer 2 w1.016: v5@7.61,24.453 9.725,26.568 v3@16.104,26.568
  other v3: 16.104,26.67
MCLR: ICSP.1 R1.2 U1.1 | length 42.6
  Top Layer w0.254: R1.2 ICSP.1 ; ICSP.1@48.768,22.986 ICSP.1 48.26,26.67 56.388,34.798 66.294,34.798 68.199,32.893 68.199,29.464 74.075,23.588 U1.1
MISO: U1.12 U4.7 | length 51.3
  Top Layer w0.254: U4.7 21.713,19.3 22.606,20.193 33.147,20.193 35.941,22.987 40.132,22.987 43.815,19.304 61.849,19.304 62.992,20.447 66.294,20.447 66.925,21.078 U1.12
MOSI: U1.22 U3.5 U4.5 | length 66.7
  Top Layer w0.254: U4.5 21.602,18.3 22.733,19.431 32.893,19.431 37.211,15.113 39.243,15.113 40.386,16.256 61.849,16.256 63.754,18.161 69.469,18.161 70.175,17.455 U1.22 70.175,14.534 70.612,14.097 70.612,10.795 70.37,10.553 U3.5
Motor+: C38.1 Q3.1 Q3.2 Q3.3 Q5.5 Q5.6 Q5.7 Q5.8 U5.15 | length 21.1
  Top Layer w0.508: C38.1 92.456,26.035 92.964,25.527 92.964,24.003 92.647,23.685 91.376,23.685 91.162,23.471 91.162,22.249 91.821,21.59 U5.15 93.599,21.59 94.996,20.193 100.838,20.193
  other v1: 105.435,20.49 106.705,20.49 102.93,22.903 106.08,23.368 107.35,23.368 108.62,23.368 102.93,24.173 106.08,24.638 107.35,24.638 108.62,24.638 102.93,25.443 106.08,25.908 107.35,25.908 108.62,25.908
Motor-: C30.1 Q2.1 Q2.2 Q2.3 Q4.5 Q4.6 Q4.7 Q4.8 U5.11 | length 18.3
  Top Layer w0.508: C30.1@89.484,10.287 89.484,11.653 91.162,13.331 91.162,15.851 91.821,16.51 U5.11 93.599,16.51 94.996,17.907 101.473,17.907 101.473,17.018
  other v1: 106.08,12.192 107.35,12.192 108.62,12.192 102.93,12.657 106.08,13.462 107.35,13.462 108.62,13.462 102.93,13.927 106.08,14.732 107.35,14.732 108.62,14.732 102.93,15.197 105.435,17.61 106.705,17.61
NetB1_2: B1.2 D2.1 Q6.3 | length 15.5
  Top Layer w0.508: Q6.3 B1.2 29.718,33.02 32.893,29.845 D2.1
NetC7_2: C7.2 Q1.4 R2.2 R3.2 | length 6.8
  Top Layer w0.254: Q1.4@23.774,7.705 Q1.4 23.749,10.033 C7.2 R2.2 R3.2
NetC13_1: C13.1 U3.10 | length 3.1
  Top Layer w0.508: U3.10 C13.1@77.87,7.366
NetC13_2: C13.2 U3.9 | length 3.1
  Top Layer w0.508: U3.9 C13.2@76.37,7.366
NetC14_1: C14.1 U3.8 | length 3.1
  Top Layer w0.508: U3.8 C14.1@74.87,7.366
NetC35_1: C35.1 U6.1 | length 1.8
  Top Layer w0.635: U6.1 80.264,6.096 C35.1
NetC35_2: C35.2 D6.2 L2.1 U6.6 | length 5
  Top Layer w0.635: L2.1 82.296,7.644 C35.2 82.804,6.604 ; U6.6 82.804,6.604 ; D6.2 82.804,6.604
NetR5_1: R5.1 U3.12 | length 3.8
  Top Layer w0.254: R5.1@53.82,2.286 U3.12
NetR10_1: R10.1 U5.10 | length 5.2
  Top Layer w0.508: U5.10 93.599,15.24 95.377,17.018 R10.1
NetR11_1: R11.1 U5.13 | length 16.6
  Top Layer w0.508: U5.13@93.675,19.05 94.056,18.669 108.077,18.669 108.458,18.288 R11.1
NetR12_1: R12.1 U5.16 | length 5.2
  Top Layer w0.508: U5.16 93.599,22.86 95.377,21.082 R12.1
NetR13_1: R13.1 U5.14 | length 17.7
  Top Layer w0.508: U5.14 93.599,20.32 94.488,19.431 108.077,19.431 108.458,19.812 R13.1
NetR15_1: R15.1 R16.2 U6.3 | length 5.5
  Top Layer w0.254: R15.1 79.121,3.429 79.436,3.114 U6.3 80.264,2.032 R16.2
NetR17_1: R17.1 R22.1 U7.12 | length 3
  Top Layer w0.254: R17.1 69.723,33.386 U7.12
NetR18_1: R18.1 R19.1 U7.10 | length 8.9
  Top Layer w0.254: U7.10 72.756,34.686 74.168,33.274 74.168,29.464 ; R18.1@73.406,29.464 74.168,29.464 ; R19.1@74.93,29.464 74.168,29.464
NetR20_1: R20.1 R21.2 U7.9 | length 6.1
  Top Layer w0.254: U7.9 72.256,35.336 72.674,35.754 72.674,37.338 R21.2 R20.1
PGC: ICSP.5 U1.5 | length 27.7
  Top Layer w0.254: ICSP.5 58.42,29.591 61.595,32.766 66.04,32.766 66.675,32.131 66.675,28.575 71.475,23.775 U1.5
PGD: ICSP.4 U1.4 | length 31.8
  Top Layer w0.254: ICSP.4 55.88,29.337 60.325,33.782 66.167,33.782 67.437,32.512 67.437,29.083 72.125,24.395 U1.4
Pressure+: U7.3 U8.2 | length 2.6
  Top Layer w0.254: U7.3 77.993,33.386 78.494,32.885 U8.2
Pressure+Buffered: R19.2 U7.1 U7.2 | length 3.6
  Top Layer w0.254: R19.2@76.454,29.464 76.581,29.464 77.118,30.001 U7.1 U7.2
Pressure-: U7.5 U8.3 | length 2.6
  Top Layer w0.254: U7.5 77.963,34.686 78.427,34.222 U8.3
Pressure-Buffered: R20.2 U7.6 U7.7 | length 2
  Top Layer w0.254: U7.6 U7.7 R20.2@77.118,37.338
PressureOut: R21.1 U1.2 U7.8 | length 23.4
  Top Layer w0.254: R21.1@71.218,37.182 U7.8 69.514,35.986 68.961,35.433 68.961,29.845 74.93,23.876 74.93,21.209 74.549,20.828 73.787,20.828 73.425,21.19 U1.2
PWM1H: U1.25 U5.3 | length 18.4
  Top Layer w0.254: U1.25 72.125,17.515 73.406,18.796 82.423,18.796 83.947,20.32 U5.3
PWM1L: U1.26 U5.4 | length 17.1
  Top Layer w0.254: U1.26 72.775,17.276 73.66,18.161 82.804,18.161 83.693,19.05 U5.4
QEA: SW1.3 U1.23 | length 36.4
  Top Layer w0.254: SW1.3 39.664,16.55 40.386,17.272 61.849,17.272 63.5,18.923 69.723,18.923 70.825,17.821 U1.23
QEB: SW1.5 U1.24 | length 38.5
  Top Layer w0.254: SW1.5 41.242,18.288 61.849,18.288 63.246,19.685 69.977,19.685 71.475,18.187 U1.24
SCK: U1.21 U3.4 U4.4 | length 65.7
  Top Layer w0.254: U4.4 21.991,17.8 22.86,18.669 32.512,18.669 36.703,14.478 39.624,14.478 40.386,15.24 61.849,15.24 64.008,17.399 69.215,17.399 69.525,17.089 U1.21 69.525,14.549 70.104,13.97 70.104,11.176 68.87,9.942 U3.4
SCL1: R4.2 SPO2.4 U1.17 | length 13.9
  Top Layer w0.254: R4.2 SPO2.4@58.167,10.541 ; SPO2.4 58.196,11.968 58.801,12.573 62.23,12.573 63.5,13.843 66.294,13.843 66.925,14.474 U1.17
SDA1: R6.2 SPO2.3 U1.18 | length 17.3
  Top Layer w0.254: R6.2 56.769,9.144 58.674,9.144 59.446,9.916 SPO2.3 59.446,11.694 59.69,11.938 62.611,11.938 64.008,13.335 66.421,13.335 67.575,14.489 U1.18
Vcap: C5.1 C6.1 U1.20 | length 4.2
  Top Layer w0.381: U1.20 68.875,13.929 C5.1 C6.1
Vcc1: C24.1 R7.2 U4.34 | length 2.8
  Top Layer w0.305: C24.1 R7.2 10.696,17.3 U4.34
VCP1: C21.2 U4.38 | length 2.9
  Top Layer w0.254: C21.2 12.446,14.732 13.208,15.494 13.843,15.494 14.006,15.331 U4.38
Vref: R18.2 U1.3 U7.13 U7.14 | length 18.6
  Top Layer w0.254: U7.13 U7.14 71.218,31.017 71.755,30.48 R18.2 71.755,28.067 75.565,24.257 75.565,20.828 74.93,20.193 73.406,20.193 72.775,20.824 U1.3
pads on no net: ICSP.6 U4.8 U4.9 U4.12 U4.14 U4.16 U4.18 U4.20 U4.22 U4.23 U4.24 U4.25 U4.26 U4.27 U4.28 U4.30 U4.41 U4.43 U4.45 U4.47 U6.4 U8.0
copper on no net:
  other v6: 51.02,4.15 91.22,4.15 51.02,27.25 91.22,27.25
  other v9: 30.48,12.7 30.48,25.4
  other v11: 45.843,26.492 63.377,26.492
  other v12: 86.36,33.528

## Polygon pours and split planes (outlines as drawn)
GND on Top Layer "Top Gnd" (solid, remove dead copper, pour order 6): 109.728,14.732 111.252,14.732 111.252,22.098 110.49,22.098 110.49,26.924 104.14,26.924 104.14,38.1 114.3,38.1 114.3,0 104.14,0 104.14,11.176 109.728,11.176
+3.3v on Signal Layer 2 "Inner +3.3v" (solid, remove dead copper, pour order 4): 66.04,27.432 69.977,31.369 76.073,31.369 78.105,29.337 78.105,26.169 78.105,15.113 76.327,13.335 58.42,13.335 50.673,21.082 40.894,21.082 35.814,26.162 35.814,26.924 36.322,27.432 48.895,27.432
+24v on Signal Layer 2 "Inner +24v" (solid, remove dead copper, pour order 0): 37.211,14.859 51.943,14.859 55.245,11.557 79.629,11.557 91.44,23.368 91.44,34.29 101.6,34.29 101.6,0 0,0 0,38.1 13.97,38.1
GND on Signal Layer 1 "Inner Ground" (solid, remove dead copper, pour order 8): 0,0 0,38.1 114.3,38.1 114.3,0
GND on Bottom Layer "Bottom Ground" (solid, remove dead copper, pour order 10): 0,0 0,38.1 114.3,38.1 114.3,0

## Keep-outs
Keep-Out Layer:
  the board outline again, w0.127

## Other copper
Top Layer:
  rectangle net +Vin: 24.638,5.842 37.719,10.414
  region net Motor-: 100.838,14.732 101.092,14.986 101.092,18.161 107.569,18.161 109.474,16.256 109.474,11.176 100.076,11.176 100.076,14.732
  region net Motor+: 100.203,25.654 100.203,19.939 107.569,19.939 109.474,21.844 109.474,26.924 101.981,26.924 100.711,25.654
Bottom Layer:
  region net +24v: 93.472,27.686 93.472,10.414 101.727,10.414 101.727,27.686
  region net Motor-: 110.49,10.414 110.49,18.669 102.362,18.669 102.362,10.414
  region net Motor+: 110.49,19.431 110.49,27.686 102.362,27.686 102.362,19.431

## Silkscreen, mask and mechanical layers (free items; w line width, h text height)
Top Overlay:
  region: 46.355,23.05 45.593,20.892 47.117,20.892
  lines w0.203: 6.096,17.018 9.525,17.018
  text "CJB2020/03" at 66.04,18.669 h0.76
  text "-DC+ / MOTOR" at 105.156,15.875 h1.14 r90
  text "Open Source / Ventilator Driver / Version 1.0" at 41.148,13.589 h1.27
  text "24VDC Center Positive 5A max" at 46.99,0.508 h1.14
Bottom Overlay:
  lines w0.203: 53.59,12.65 91.19,25.45 ; 53.59,25.45 91.19,12.65
Top Solder:
  rectangle: 101.6,11.176 104.14,16.016
  rectangle: 101.6,22.098 104.14,26.938